# EAGLE board My project (EAGLE 9.7.0)

Size 275.95 x 151.11 mm. Coordinates in mm from the lower left corner, seen from the top.
Outline: 0,0 275.95,0 275.95,151.11 0,151.11 0,0
Copper layers (1*16): Top 0.035mm / dielectric 1.5mm / Bottom 0.035mm
Design rules "default": minimum track width 6mil, minimum drill 0.35mm, track to track 6mil, track to pad 6mil, pad to pad 6mil, via to via 6mil, smd to smd 6mil, copper to edge 40mil, drill to drill 6mil, minimum pad ring 10mil, minimum via ring 8mil, stop-mask expansion 4mil, vias tented up to drill 0mil, thermal gap 10mil

## Footprints (pad centres in the part's own frame; a part is rotated, then mirrored left to right if it is on the bottom)
BATTERY-GENERIC = drill 1.118 pad 3.15 octagon: + 2.54,0; - -2.54,0
1X02 = drill 1.016 long: 1 -1.27,0; 2 1.27,0
RESAD1016W63L850D250B = drill 0.83 pad 1.43: 1 -5.08,0; 2 5.08,0
HA-06-SM065 = drill 1 pad 1.676: 1 -2.54,-2.54; 2 0,2.54; 3 2.54,-2.54
SWITCH-MOMENTARY-PTH-6.5MM = drill 1.016 pad 1.88: 1 -3.251,2.261; 2 3.251,2.261; 3 -3.251,-2.261; 4 3.251,-2.261
TO220BV = drill 1.016 long: D 0,-2.54; G -2.54,-2.54; S 2.54,-2.54
ARDUINO-UNO-R3-SHIELD = drill 1.016 pad 1.88: 3.3V 24.13,-2.54; 5V 24.13,0; A0 24.13,12.7; A1 24.13,15.24; A2 24.13,17.78; A3 24.13,20.32; A4 24.13,22.86; A5 24.13,25.4; AREF -24.13,-13.97; D2 -24.13,20.32; D3 -24.13,17.78; D4 -24.13,15.24; D5 -24.13,12.7; D6 -24.13,10.16; D7 -24.13,7.62; D8 -24.13,3.81; D9 -24.13,1.27; D10 -24.13,-1.27; D11 -24.13,-3.81; D12 -24.13,-6.35; D13 -24.13,-8.89; GND@0 24.13,2.54; GND@1 24.13,5.08; GND@2 -24.13,-11.43; IOREF 24.13,-7.62; NC 24.13,-10.16; RES 24.13,-5.08; RX -24.13,25.4; SCL -24.13,-19.05; SDA -24.13,-16.51; TX -24.13,22.86; VIN 24.13,7.62
LCD-I2C = drill 1.016 long: 1 -19.05,-5.08; 2 -19.05,-7.62; 3 -19.05,-10.16; 4 -19.05,-12.7

## Placement (x,y rotation side)
BAT3  9V  [BATTERY-GENERIC]  186.08,142.85 90 top
L1  LIGHTBULB  [1X02]  90.9,108.17 0 top
L2  LIGHTBULB  [1X02]  68.76,109.03 0 top
L3  LIGHTBULB  [1X02]  43.54,110.59 0 top
R1  100  [RESAD1016W63L850D250B]  51.16,95.54 180 top
R2  100  [RESAD1016W63L850D250B]  6.33,98.19 270 top
R3  100  [RESAD1016W63L850D250B]  26.45,99.04 270 top
R6  100  [RESAD1016W63L850D250B]  75.22,96.22 180 top
R7  100  [RESAD1016W63L850D250B]  97.04,94.04 180 top
RPOT2  250k  [HA-06-SM065]  118.71,15.35 0 top
S0  SWITCH_MOMENTARY  [SWITCH-MOMENTARY-PTH-6.5MM]  8.87,89.3 90 top
S1  SWITCH_MOMENTARY  [SWITCH-MOMENTARY-PTH-6.5MM]  28.99,90.15 90 top
T2  NMOSFET  [TO220BV]  43.54,98.08 0 top
T3  NMOSFET  [TO220BV]  67.6,98.76 0 top
T4  NMOSFET  [TO220BV]  89.42,96.58 0 top
U3  ARDUINO-UNO-R3-SHIELD  [ARDUINO-UNO-R3-SHIELD]  62.42,41.65 270 top
U10  LCD-16X2-I2CSUNFOUNDER-IIC  [LCD-I2C]  220.33,36.63 0 top

## Library data of the parts
BAT3 L1-L3 R1-R3 R6 R7 RPOT2 S0 S1 U3 U10 = Tinkercad
T2-T4 = Tinkercad; CATEGORY: Transistor; SUB-CATEGORY: MOSFET; TYPE: N-Channel

## Nets
BAT3+: BAT3.+ L1.2 L2.2 L3.2 RPOT2.1 S0.4 S1.4 U3.5V U10.2
BAT3-: BAT3.- R1.1 R2.1 R3.1 R6.1 R7.1 RPOT2.3 U3.GND@0 U3.GND@1 U3.GND@2 U10.1
L1_1: L1.1 T4.D
L2_1: L2.1 T3.D
L3_1: L3.1 T2.D
T2_S: R1.2 T2.S
T3_S: R6.2 T3.S
T4_S: R7.2 T4.S
U3_A2: RPOT2.2 U3.A2
U3_D2: T4.G U3.D2
U3_D3: T3.G U3.D3
U3_D4: T2.G U3.D4
U3_D12: R3.2 S1.1 S1.2 U3.D12
U3_D13: R2.2 S0.1 S0.2 U3.D13
U3_SCL: U3.SCL U10.4
U3_SDA: U3.SDA U10.3

## Tracks (layer width: path | path; a pad name or v marks a point on that pad's centre or on a via)
BAT3+  (8 unrouted)
BAT3-  (10 unrouted)
L1_1  (1 unrouted)
L2_1  (1 unrouted)
L3_1  (1 unrouted)
T2_S  (1 unrouted)
T3_S  (1 unrouted)
T4_S  (1 unrouted)
U3_A2  (1 unrouted)
U3_D2  (1 unrouted)
U3_D3  (1 unrouted)
U3_D4  (1 unrouted)
U3_D12  (3 unrouted)
U3_D13  (3 unrouted)
U3_SCL  (1 unrouted)
U3_SDA  (1 unrouted)